# Altium PCB Rectifier.PcbDoc
Units mil, origin at the board's own origin, x right, y up, seen from the top; angles counter-clockwise.
Board outline 2400 x 2200 mil, 2 copper layers (Top Layer, Bottom Layer); 13 components, 7 nets, 31 pads, 0 vias.
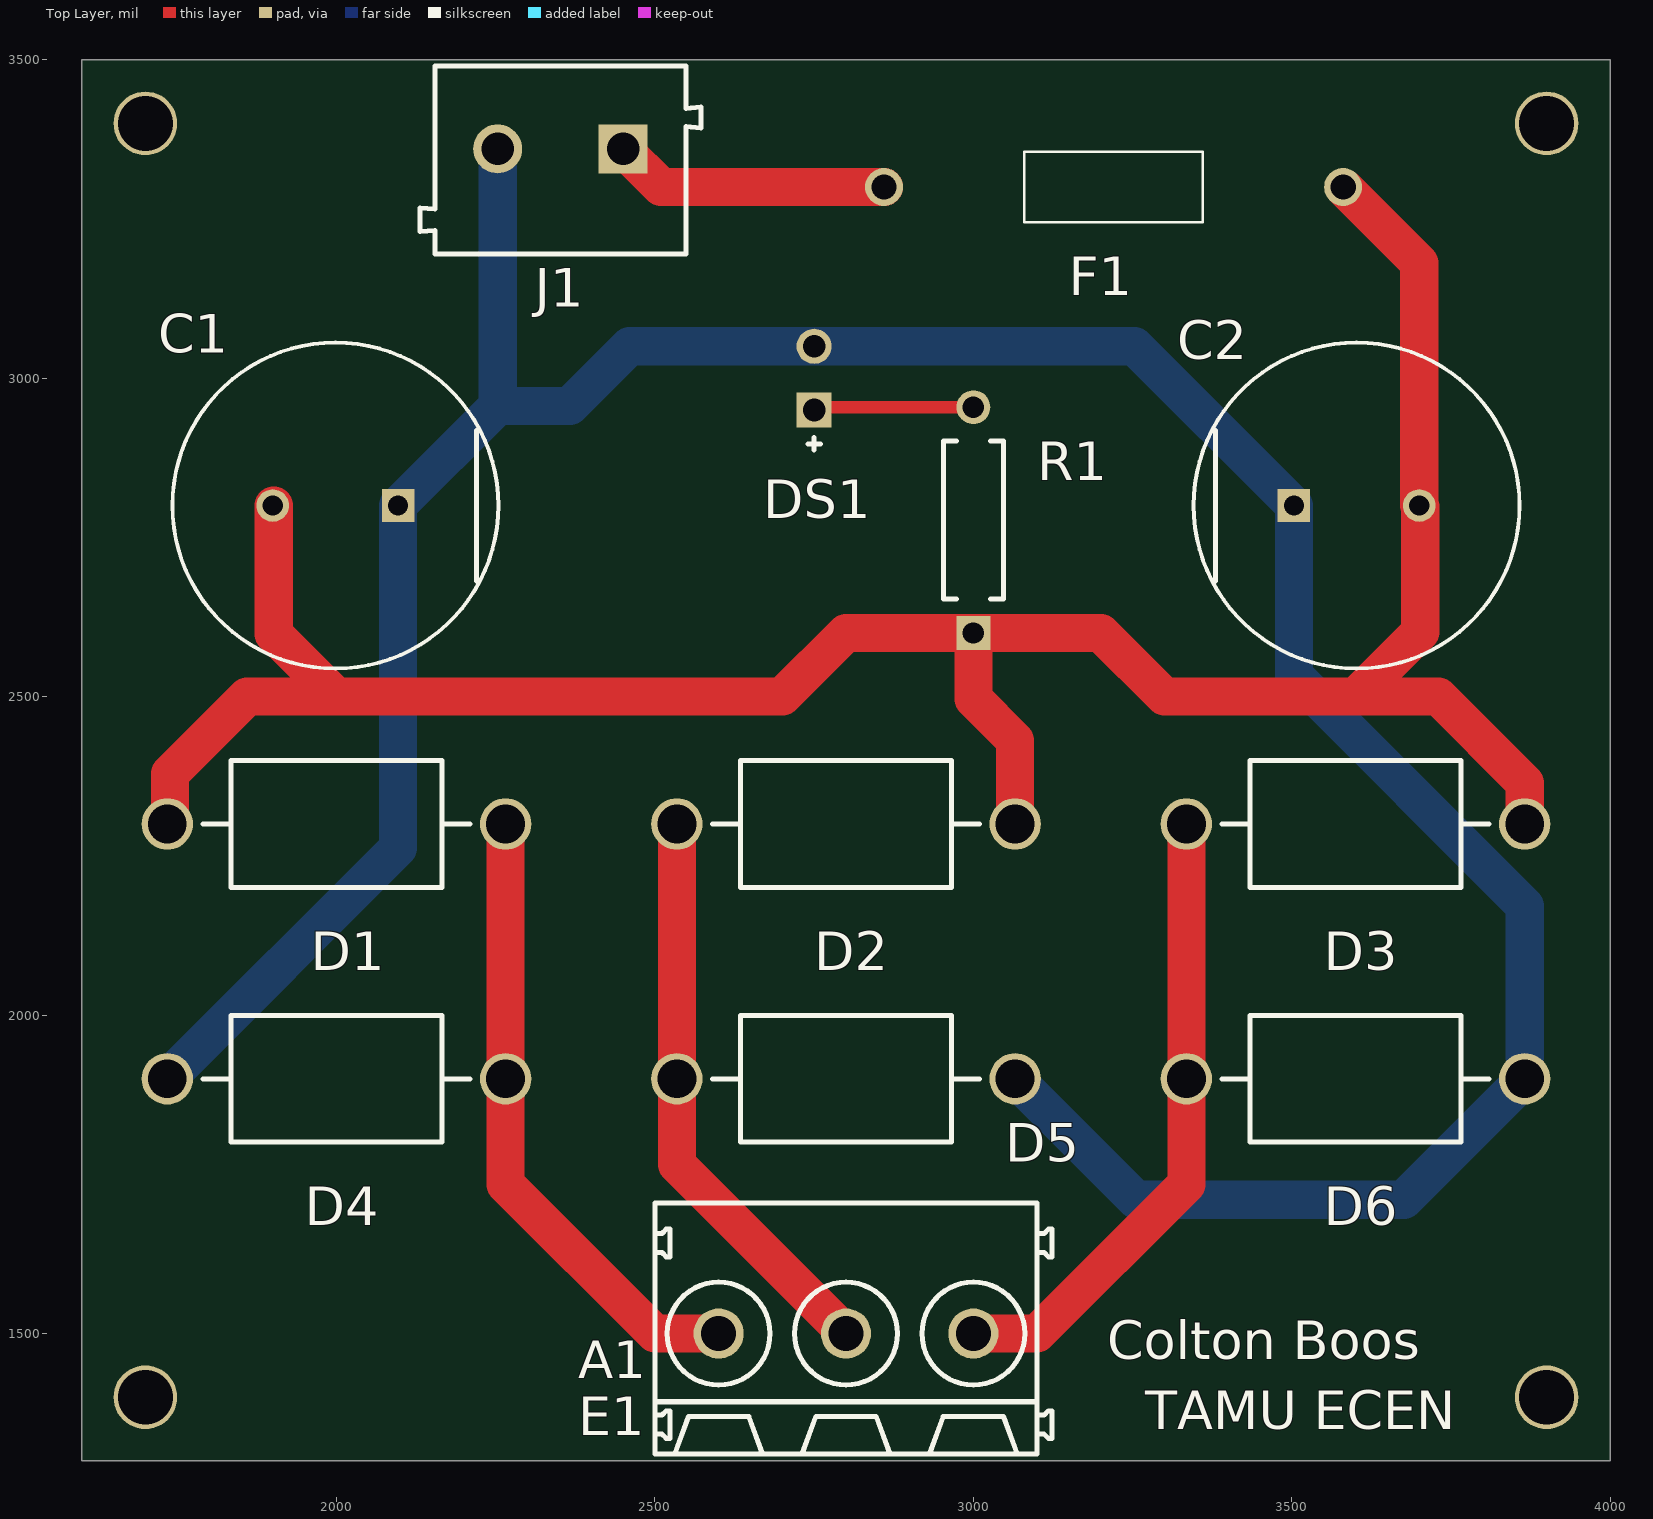
[diagram p0: Top Layer view]
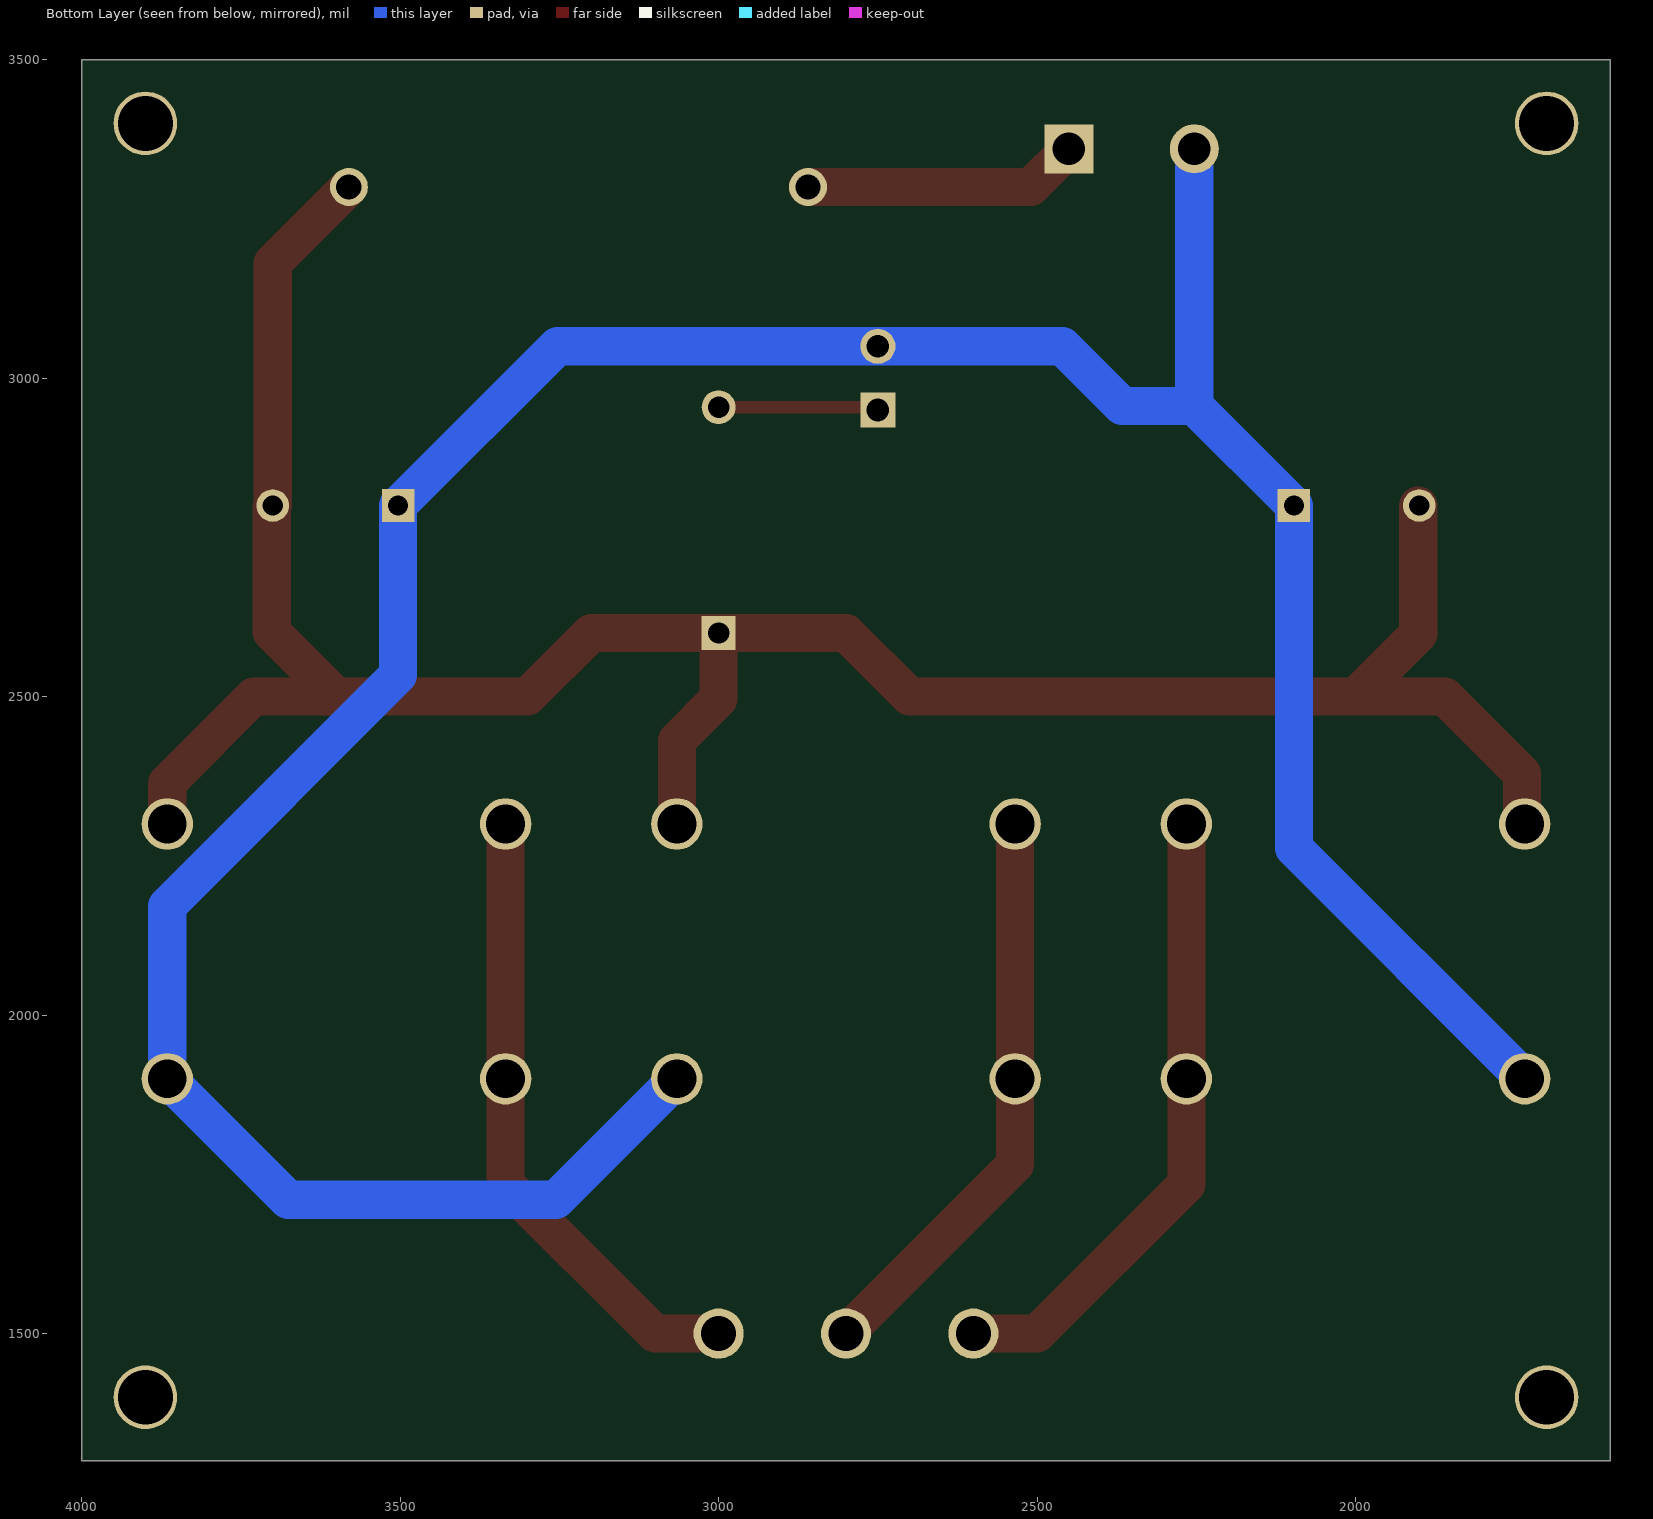
[diagram p1: Bottom Layer view, seen from below]

## Layer stack, top to bottom
Top Solder: solder mask 0.4, Solder Resist, Dk 3.5
Top Layer: signal copper 1.4
Dielectric 1: dielectric 12.6, FR-4, Dk 4.5
Bottom Layer: signal copper 1.4
Bottom Solder: solder mask 0.4, Solder Resist, Dk 3.5

## Board outline
1600,3500 1600,1300 4000,1300 4000,3500

## Design rules (kind name [scope] priority, off if disabled: settings)
Clearance [All] p1: gap=10 ignorepadtopadclearanceinfootprint=FALSE except(0: Arc-Hole Track-Hole SMDPad-Hole THPad-Hole Via-Hole Fill-Hole Poly-Hole Region-Hole Text-Hole)
PolygonConnect [All] p1: connectstyle=Relief reliefconductorwidth=10 reliefentries=4 polygonreliefangle="90 Angle" airgapwidth=10
RoomDefinition Rectifier [InComponentClass('Rectifier')] p1: confinementstyle=ConfineIn formatcopy=TRUE lockcomponents=FALSE outline 1400,1100 4200,1100 4200,3700 1400,3700
RoutingVias [All] p1: holewidth=28 width=50 viastyle="Through Hole" minholewidth=28 minwidth=50 maxholewidth=28 maxwidth=50
SolderMaskExpansion [All] p1: expansion=4 istentingtop=FALSE
Width [All] p1: maxlimit=61 minlimit=10 preferedwidth=10
30 further rules are at their usual default settings.

## Components (designator, comment, footprint, x,y, rotation, side; value= is the part's Value field where it differs from the comment)
C1 "EEUFR1V102" FP-RAD-TH-D_12_5_0_5-L_20-MFG 1998.43,2800 r180 top
C2 "EEUFR1V102" FP-RAD-TH-D_12_5_0_5-L_20-MFG 3601.57,2800 r0 top
D1 "1N5401RLG" ONSC-AXIAL_LEAD-2-267-05_V 2000,2300 r0 top
D2 "1N5401RLG" ONSC-AXIAL_LEAD-2-267-05_V 2800,2300 r180 top
D3 "1N5401RLG" ONSC-AXIAL_LEAD-2-267-05_V 3600,2300 r180 top
D4 "1N5401RLG" ONSC-AXIAL_LEAD-2-267-05_V 2000,1900 r180 top
D5 "1N5401RLG" ONSC-AXIAL_LEAD-2-267-05_V 2800,1900 r0 top
D6 "1N5401RLG" ONSC-AXIAL_LEAD-2-267-05_V 3600,1900 r0 top
DS1 "LTL-1CHG" LTST-LTL-1CHG-2 2750,3000 r90 top
E1 "1716090000" LM_5_08_90_03 2800,1507.87 r0 top
F1 "0251012.NAT1L" 0251012NAT1L 3220,3300 r180 top
J1 "691102710002" 691102710002 2351.57,3342.28 r180 top
R1 "MFR-25FBF52-1K" RESA60-630X240 3000,2777.17 r90 top value=1k

## Footprints (in the part's own frame and the unit in brackets; to place one, negate y for a bottom-side part, rotate by r counter-clockwise, add the part's x,y. Pads: shape width x height; smd on the part's side, far side on the other; paste and mask are expansions set on the pad)
0251012NAT1L [mm]
  round 1.515 hole 1.01: 1(-9.155,0) 2(9.155,0)
  silkscreen extent -3.55,-1.4 3.55,1.4
691102710002 [mm] "5,00mm - modular - blue - Horizontal entry with pressure clamp - 9,9 mm height - 02p"
  rect 1.95x1.95 hole 1.3: 1(-2.5,-0.45)
  round 1.95 hole 1.3: 2(2.5,-0.45)
  silkscreen extent -5.6,-3.75 5.6,3.75, body extent -5.6,-3.75 5.6,3.75, height 9.96
FP-RAD-TH-D_12_5_0_5-L_20-MFG [mm]
  rect 1.3x1.3 hole 0.8 paste-1000 mask+0: 1(-2.5,0)
  round 1.3 hole 0.8 paste-1000 mask+0: 2(2.5,0)
  silkscreen extent -6.5,-6.5 6.5,6.5, body extent -6.6,-6.6 6.6,6.6, height 0.25
LM_5_08_90_03 [mm] "OMNIMATE Signal - Serie LM  LM 5.08/03/90 3.5"
  round 2 hole 1.4: A1(-5.08,-0.2) A2(0,-0.2) A3(5.08,-0.2)
  silkscreen extent -7.62,-5 8.22,5, body extent -7.62,-5 8.22,5, height 13.81
LTST-LTL-1CHG-2 [mm] "TH, 2-Leads, Dia 3.8mm"
  rect 1.4x1.4 hole 0.9: 1(-1.27,0)
  round 1.4 hole 0.9: 2(1.27,0)
  silkscreen extent -2.87,-0.25 -2.37,0.25, body extent -1.9,-1.9 1.9,1.9, height 6.5
ONSC-AXIAL_LEAD-2-267-05_V [mm] "AXIAL, 2-Leads, Diameter 5.05mm"
  round 2.05 hole 1.55: 1(-6.745,0) 2(6.745,0)
  silkscreen extent -5.32,-2.52 5.32,2.52
RESA60-630X240 [mm] "Axial Resistor, 2-Leads, Dia 2.4mm, Body Length 6.3mm"
  rect 1.35x1.35 hole 0.85: 1(-4.5,0)
  round 1.35 hole 0.85: 2(4.5,0)
  silkscreen extent -3.15,-1.2 3.15,1.2, body extent -4.77,-1.19 4.77,1.2, height 2.4

## Part data
C1 C2: library part CMP-05427-000195-1, "Aluminum Electrolytic Capacitors (Radial Lead Type) 1000uF ±20% 35V", Capacitance=1mF, Case/Package=Radial, ESR (Equivalent Series Resistance)=18mR, Max Operating Temperature=105°C, Min Operating Temperature=-40°C, Package Quantity=200, Ripple Current=2.6A, Tolerance=20%, Voltage=35V, Construction=RADIAL, Contact Plating=Tin, Diameter=12.5mm, Height=20mm, Height - Seated (Max)=0.866inch, Impedance=18mR, Lead Diameter=0.6mm, Lead Free="Lead Free", Lead Pitch=5mm, Lead/Base Style=Straight, Length=20mm, Life (Hours)=10000Hour, Mount="Through Hole", Number of Pins=2, Packaging=Bulk, Polarity=Polar, Radiation Hardening=No, Ripple Current (AC)=2.6A, RoHS Compliant=Yes, Series=FR, Termination=Radial, Voltage Rating=35V, Voltage Rating (DC)=35V
D1 D2 D3 D4 D5 D6: library part CMP-0902-00079-1, "Standard Recovery Rectifier, 2-Pin Axial_Lead, Pb-Free, Tape and Reel", Manufacturer="On Semiconductor", ComponentLink1Description="Manufacturer URL", ComponentLink1URL=http://www.onsemi.com/, ComponentLink2Description=Datasheet, ComponentLink2URL=http://www.onsemi.com/pub_link/Collateral/1N5400-D.PDF, ComponentLink3Description="Package Specification", ComponentLink3URL=http://www.onsemi.com/pub_link/Collateral/267-05.PDF, DatasheetVersion="Rev. 10", IFSM Max (A)=200, IO(rec) Max (A)=3, Mounting Technology="Through Hole", PackageDescription="2-Pin, Axial Lead, Diameter 5.05 mm", PackageReference=AXIAL_LEAD-2-267-05, PackageVersion="Rev. G, 06/2000", Packing="Tape and Reel", PartNumber=1N5401RLG, RoHS=TRUE, Type="Standard Recovery", VRRM Max (V)=100
DS1: library part CMP-007-00019-2, "LED Uni-Color Green, 100 mW, 30 mA, -55 to 100 degC, 2-Pin THD, RoHS, Bulk", Case/Package=Radial, Colour=Green, Forward Current=30mA, Forward Voltage=2.6V, Manufacturer=Lite-On, Max Operating Temperature=100°C, Min Operating Temperature=-55°C, Package Description="2-Pin Through Hole Device, Dia 3.8 mm", Package Quantity=1000, Power=100mW, Datasheet URL=http://datasheet.octopart.com/LTL-1CHG-Lite-On-datasheet-143841.pdf, Datasheet Version=Mar-00, Illumination Colour=Green, Lens Style=Dome, Luminous Intensity=12.6mcd, Manufacturer URL=http://www.us.liteon.com/, Mounting Technology=TH, Nominal Vf=2.1V, Package Reference=LTL-1CHG, Packaging=Bulk, Pins=2, RoHS Compliant=True, Viewing Angle=60degrees
E1: library part CMP-1559-01768-1, "OMNIMATE Signal - series LM", Colour=Orange, Manufacturer=Weidmueller, Rated_current_use_group_B_UL_1059="15 A", Rated_voltage_for_surge_voltage_class_pollution_degree_II_2="630 V", Rated_voltage_use_group_B_UL_1059="300 V", UL_94_flammability_rating=V-0, ComponentLink1Description="Manufacturer URL", ComponentLink1URL=http://www.weidmueller.com/, ComponentLink2Description="URL Link1", ComponentLink2URL=http://catalog.weidmueller.com/catalog/Start.do?localeId=en&ObjectID=1716090000, Contact_material=Cu-Leg, Contact_surface=tinned, Insulating_material="Wemid (PA)", Mounting_onto_the_PCB="Solder connection", No_of_poles=3, PackageReference=LM_5_08_90_03, Packaging=Box, PartNumber=1716090000, Pitch_inch="0,2 inch", Pitch_mm="5,08 mm", Qty="500 PCS", Revision=V1, Short_text_for_material="LM 5.08/03/90 3.5SN OR BX", Side_termination_characteristic="closed side", Solder_pin_length_mm="3,5 mm", Solid_max_H05_07_V_U="2,5 mm²", Solid_min_H05_07_V_U="0,2 mm²", Wire_cross_section_AWG_max_UL_1059="AWG 14", Wire_cross_section_AWG_min_UL_1059="AWG 24"
F1: "Fuse", Manufacturer_Name=LITTELFUSE, Datasheet Link=https://www.jameco.com/Jameco/Products/ProdDS/1710451.pdf, Height=2.8mm, Manufacturer_Part_Number=0251012.NAT1L
J1: library part CMP-1502-03258-1, "Series 102 - 5.00 mm Horizontal Entry Modular with Pressure Clamp WR-TBL, 2 pin", Manufacturer="Wurth Elektronik", Operating Temperature=-40to105degC, Datasheet URL=http://katalog.we-online.de/em/datasheet/6911027100xx.pdf, Manufacturer URL=http://www.we-online.de, Mounting Technology=THT, Package Reference=691102710002, Packaging=Box, Part Number=691102710002, Pin Number=2, Pitch=5.00mm, Publisher=WurthElektronik
R1: library part CMP-009-00048-4, "Axial Resistor, 1 KOhm, +/- 1%, 250 mW, -55 to 155 degC, 2-Pin THD, RoHS, Bulk", Case/Package=Axial, Manufacturer=Yageo, Max Operating Temperature=155°C, Min Operating Temperature=-55°C, Package Description="2-Pin Axial Lead, Dia 2.4 mm, Body Length 6.3 mm", Package Quantity=200, Package Reference=MFR-25, Power=250mW, Tolerance=1%, Voltage Rating=250V, Composition=CarbonFilm, Datasheet URL=http://www.yageo.com/documents/recent/Yageo%20LR_MFR_2013.pdf, Datasheet Version=Apr-13, Manufacturer URL=http://www.yageo.com/, Mounting Technology=TH, Packaging=Bulk, RoHS Compliant=True

## Free pads (board coordinates)
  round 100 hole 86: 2(1700,3400) 3(3900,3400) 4(3900,1400) 5(1700,1400)

## Nets (pads, with @x,y where several pads share a name; then routed paths per layer and width w, separated by ;. In a path a pad name is that pad's centre, name@x,y a point inside that pad or via, vN(x,y) a via of type N, cw(c..) or ccw(c..) an arc to the next point about the centre after c; other vN are vias at no path point)
GND: C1.1 C2.1 D4.2 D5.2 D6.2 DS1.2 J1.2 | length 5078.7
  Bottom Layer w10: J1.2@2253.15,3329.16 2252.31,3330 2250,3330 2253.15,3333.15 J1.2 ; D6.2 D6.2@3865.55,1934.45
  Bottom Layer w60: D4.2 2096.85,2262.4 C1.1 2253.15,2956.3 ; J1.2@2253.15,3329.16 2253.15,2956.3 ; D5.2 3255.55,1710 3675.55,1710 D6.2 ; D6.2@3865.55,1934.45 3865.55,2171.47 3503.15,2533.88 C2.1 3253.15,3050 DS1.2 2460,3050 2366.3,2956.3 2253.15,2956.3
NetC1_2: C1.2 C2.2 D1.1 D2.1 D3.1 F1.1 R1.1 | length 4019.7
  Top Layer w10: F1.1@3584.06,3296.46 F1.1@3584.06,3300 ; C2.2 C2.2@3701.57,2798.43
  Top Layer w50: D1.1 D1.1@1738.79,2304.34
  Top Layer w60: D1.1@1738.79,2304.34 1738.79,2378.79 1860,2500 2000,2500 ; C1.2@1901.57,2800 1901.57,2598.43 2000,2500 ; D2.1 3065.55,2431.1 3000,2496.65 R1.1 ; F1.1@3584.06,3296.46 3700,3180.51 C2.2 ; C2.2@3701.57,2798.43 3701.57,2601.57 3600,2500 ; D3.1 3865.55,2364.45 3730,2500 3600,2500 ; 2000,2500 2700,2500 2800,2600 R1.1 ; R1.1 3200,2600 3300,2500 3600,2500
NetD1_2: D1.2 D4.1 E1.A1 | length 997.1
  Top Layer w60: D1.2 D4.1 2265.55,1734.45 2500,1500 E1.A1
NetD2_2: D2.2 D5.1 E1.A2 | length 915.5
  Top Layer w60: D5.1@2534.45,1894.45 D2.2 ; D5.1 2534.45,1765.55 E1.A2
NetD3_2: D3.2 D6.1 E1.A3 | length 997.1
  Top Layer w60: E1.A3 3100,1500 3334.45,1734.45 D6.1 D3.2
NetDS1_1: DS1.1 R1.2 | length 257.9
  Top Layer w10: DS1.1@2745.67,2945.67 DS1.1 DS1.1@2754.33,2954.33
  Top Layer w20: DS1.1@2754.33,2954.33 R1.2
NetF1_2: F1.2 J1.1 | length 434.4
  Top Layer w60: J1.1 2510,3300 F1.2

## Silkscreen, mask and mechanical layers (free items; w line width, h text height)
Top Overlay:
  text "Colton Boos" at 3210,1460 h60
  text "TAMU ECEN" at 3270,1350 h60
Board Outline:
  the board outline again, w0

## Text inside footprints (layer, text, board x,y; h text height)
E1: Top Overlay "A1" at 2380,1430 h59.06